# Altium PCB FPGA_Nixie_Clock.PcbDoc
Units mil, origin at the board's own origin, x right, y up, seen from the top; angles counter-clockwise.
Board outline 7250 x 1500 mil, 2 copper layers (Top Layer, Bottom Layer); 149 components, 112 nets, 537 pads, 13 vias.
Unrouted connection lines stored in the file: 283.
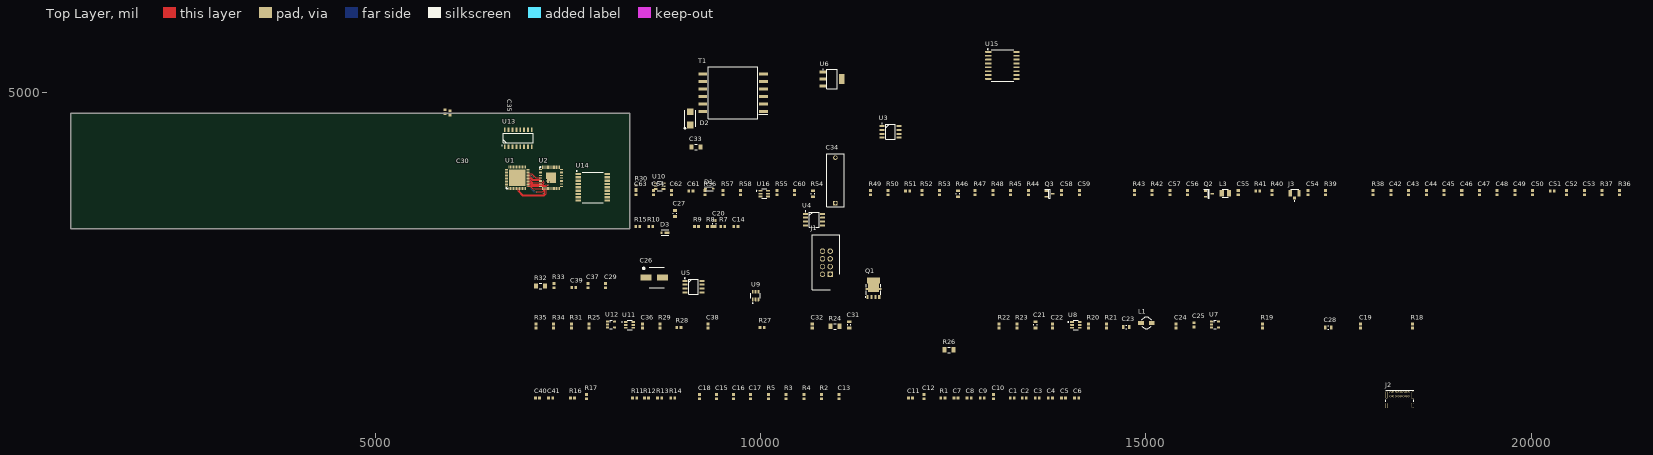
[diagram p0: Top Layer view]
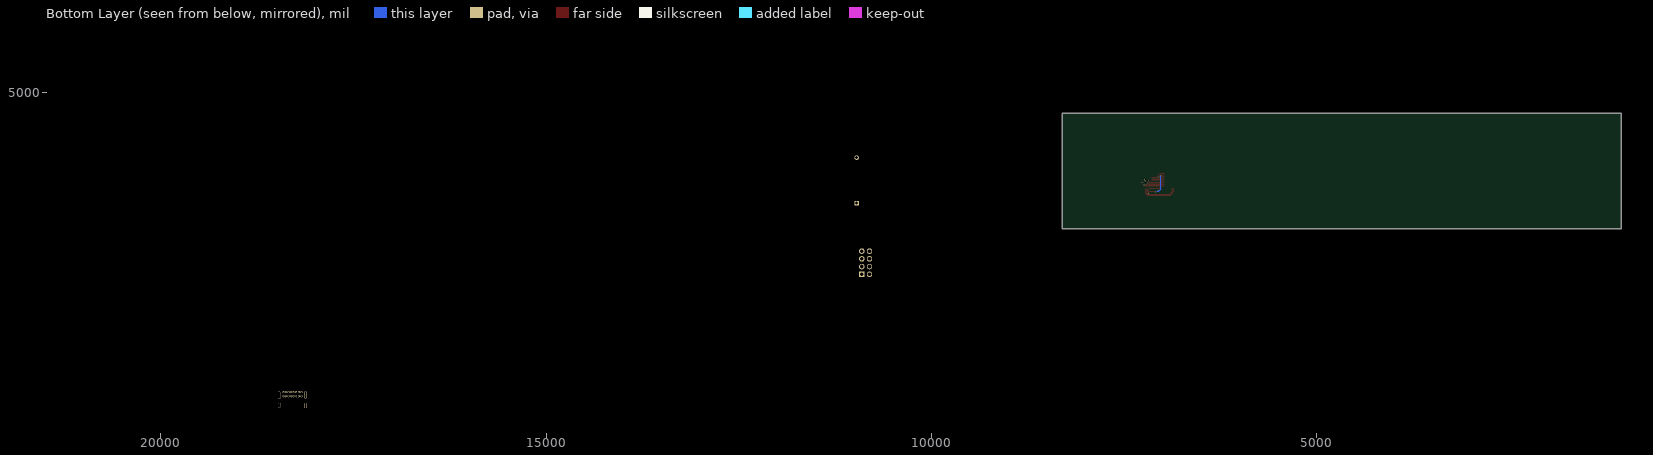
[diagram p1: Bottom Layer view, seen from below]

## Layer stack, top to bottom
Top Solder: solder mask 0.4, Solder Resist, Dk 3.5
Top Layer: signal copper 1.4
Dielectric 1: dielectric 12.6, FR-4, Dk 4.8
Bottom Layer: signal copper 1.4
Bottom Solder: solder mask 0.4, Solder Resist, Dk 3.5

## Board outline
1050,3230 1050,4730 8300,4730 8300,3230

## Design rules (kind name [scope] priority, off if disabled: settings)
BoardOutlineClearance [All] p1: gap=7.87 ignorepadtopadclearanceinfootprint=FALSE
Clearance [All] p1: gap=8 ignorepadtopadclearanceinfootprint=TRUE except(4: Arc-Arc Arc-Track Arc-SMDPad Arc-Text Track-Track Track-SMDPad Track-Text SMDPad-THPad SMDPad-Via THPad-THPad THPad-Via Via-Text Text-Text; 6: SMDPad-SMDPad SMDPad-Text THPad-Text Fill-Text Poly-Text Region-Text; 10: Arc-Hole Track-Hole SMDPad-Hole THPad-Hole Via-Hole Fill-Hole Poly-Hole Region-Hole Text-Hole; 12: Arc-THPad Track-THPad)
ComponentClearance [All] p1: gap=4 collisioncheckmode=3 verticalgap=4 showdistances=TRUE
DiffPairsRouting [All] p1: maxlimit=4 minlimit=4 mostfreqgap=4 toplayer_minwidth=4 toplayer_maxwidth=71497.94 toplayer_prefwidth=4 bottomlayer_minwidth=4 bottomlayer_maxwidth=71497.94 bottomlayer_prefwidth=4 maxuncoupledlength=500
Height [All] p1: minheight=0 maxheight=71497.94 prefheight=500
HoleSize [All] p1: absolutevalues=TRUE maxlimit=248.03 minlimit=7.87 maxpercent=80.000 minpercent=20.000
HoleToHoleClearance [All] p1: gap=9.84 allowstackedmicrovias=FALSE
MinimumAnnularRing [All] p1: minimumring=3
MinimumSolderMaskSliver [All] p1: minsoldermaskwidth=0
PlaneClearance [All] p1: clearance=4
PlaneConnect PlaneConnectPowerPads [InPadClass('PowerPads')] p1: planeconnectstyle=Direct reliefexpansion=40 reliefentries=4 reliefconductorwidth=4 reliefairgap=4
PlaneConnect [All] p2: planeconnectstyle=Direct reliefexpansion=12 reliefentries=4 reliefconductorwidth=12 reliefairgap=12
PolygonConnect ThermalPad [All vs InPadClass('ThermalPad')] p1: connectstyle=Direct reliefconductorwidth=10 reliefentries=4 polygonreliefangle="90 Angle" airgapwidth=10
PolygonConnect PolygonConnectPowerPads [All vs (InNetClass('PowerNet') OR InPadClass('PowerPads'))] p2: thpad.connectstyle=Relief thpad.reliefconductorwidth=20 thpad.reliefentries=4 thpad.polygonreliefangle="90 Angle" thpad.airgapwidth=8 smdpad.connectstyle=Relief smdpad.reliefconductorwidth=20 smdpad.reliefentries=4 smdpad.polygonreliefangle="90 Angle" smdpad.airgapwidth=8 via.connectstyle=Direct via.reliefconductorwidth=20 via.reliefentries=4 via.polygonreliefangle="90 Angle" via.airgapwidth=4
PolygonConnect [All] p3: thpad.connectstyle=Relief thpad.reliefconductorwidth=12 thpad.reliefentries=4 thpad.polygonreliefangle="90 Angle" thpad.airgapwidth=8 thpad.conductorbypadedge=TRUE thpad.mindistance=15 thpad.enablemindistance=FALSE smdpad.connectstyle=Relief smdpad.reliefconductorwidth=12 smdpad.reliefentries=4 smdpad.polygonreliefangle="90 Angle" smdpad.airgapwidth=8 smdpad.conductorbypadedge=TRUE smdpad.mindistance=15 smdpad.enablemindistance=FALSE via.connectstyle=Direct via.reliefconductorwidth=12 via.reliefentries=4 via.polygonreliefangle="90 Angle" via.airgapwidth=12
RoutingVias [All] p1: holewidth=7.87 width=17.72 viastyle="Through Hole" minholewidth=7.87 minwidth=17.72 maxholewidth=248.03 maxwidth=257.87
SilkToSilkClearance [All] p1: silktosilkclearance=0
SilkToSolderMaskClearance [IsPad] p1: minsilkscreentomaskgap=4 clearancetoexposedcopper=TRUE
SolderMaskExpansion [All] p1: expansion=2.95 istentingtop=FALSE
SupplyNets "Schematic Supply Nets" [InNet('1V1')] p1: voltage=0.000
SupplyNets "Schematic Supply Nets_10" [InNet('12V')] p2: voltage=0.000
SupplyNets "Schematic Supply Nets_9" [InNet('3V3')] p3: voltage=0.000
SupplyNets "Schematic Supply Nets_8" [InNet('VCC_1')] p4: voltage=0.000
SupplyNets "Schematic Supply Nets_7" [InNet('12V')] p5: voltage=0.000
SupplyNets "Schematic Supply Nets_2" [InNet('GND')] p6: voltage=0.000
Width [All] p1: maxlimit=71497.94 minlimit=4 preferedwidth=4
20 further rules are at their usual default settings.

## Classes and differential pairs
component class U_MCU: C42 C43 C44 C45 C46 C47 C48 C49 C50 C51 C52 C53 C54 C55 C56 C57 C58 C59 C60 C61 C62 C63 C64 J3 L3 Q2 Q3 R36 R37 R38 R39 R40 R41 R42 R43 R44 R45 R46 R47 R48 R49 R50 R51 R52 R53 R54 R55 R56 R57 R58 U2 U14 U15 U16
component class U_Nixie: C40 C41 U13
component class U_Power: C19 C20 C21 C22 C23 C24 C25 C26 C27 C28 C29 C30 C31 C32 C33 C34 C35 C36 C37 C38 C39 D1 D2 D3 J2 L1 Q1 R18 R19 R20 R21 R22 R23 R24 R25 R26 R27 R28 R29 R30 R31 R32 R33 R34 R35 T1 U6 U7 U8 U9 U10 U11 U12
component class U_FPGA: C1 C2 C3 C4 C5 C6 C7 C8 C9 C10 C11 C12 C13 C14 C15 C16 C17 C18 J1 R1 R2 R3 R4 R5 R7 R8 R9 R10 R11 R12 R13 R14 R15 R16 R17 U1 U3 U4 U5

## Components (designator, comment, footprint, x,y, rotation, side; value= is the part's Value field where it differs from the comment)
C1 "CL10B105KP8NFNC" 0603 13265,1035 r0 top
C2 "MT18B104K500CT" 0603 13420,1035 r0 top
C3 "CL10B105KP8NFNC" 0603 13590,1035 r0 top
C4 "MT18B104K500CT" 0603 13760,1035 r0 top
C5 "CL10B105KP8NFNC" 0603 13930,1035 r0 top
C6 "MT18B104K500CT" 0603 14100,1035 r0 top
C7 "CL10B105KP8NFNC" 0603 12535,1035 r0 top
C8 "MT18B104K500CT" 0603 12705,1035 r0 top
C9 "CL10B105KP8NFNC" 0603 12875,1035 r0 top
C10 "MT18B104K500CT" 0603 13020,1055 r90 top
C11 "0603X106M100CT" 0603 11945,1035 r0 top
C12 "MT18B104K500CT" 0603 12120,1055 r90 top
C13 "MT18B104K500CT" 0603 11020,1055 r90 top
C14 "MT18B104K500CT" 0603 9678.62,3260.99 r0 top
C15 "GRM1885C1H202JA01D" 0603 9430,1055 r90 top
C16 "GRM1885C1H202JA01D" 0603 9650,1055 r90 top
C17 "GRM1885C1H202JA01D" 0603 9870,1055 r90 top
C18 "MT18B104K500CT" 0603 9210,1055 r90 top
C19 "CL10A475KP8NNNC" 0603 17785,1970 r90 top
C20 "GRM21BR61E226ME44K" 0805 9400,3300 r90 top
C21 "GRM21BR61H106KE43L" 0805 13565,1985 r90 top
C22 "MT18B104K500CT" 0603 13785,1970 r90 top
C23 "GRM21BR61H106KE43L" 0805 14745,1960 r0 top
C24 "CL10B105KP8NFNC" 0603 15390,1970 r90 top
C25 "CL10A475KP8NNNC" 0603 15620,1985 r90 top
C26 "EHBSA025M1010608T" 0608 8620,2600 r0 top
C27 "GRM21BR61E226ME44K" 0805 8890,3430.37 r90 top
C28 "GRM21BR61H106KE43L" 0805 17365,1950 r0 top
C29 "CL10B105KP8NFNC" 0603 7990,2495 r90 top
C30 "MT18B104K500CT" 0603 5972.44,4736.22 r270 top
C31 "GRM2165C2A153JA01D" 0805 11150,1985 r90 top
C32 "CL10B105KP8NFNC" 0603 10670,1970 r90 top
C33 "VJ1206Y473KXEAT5Z" 1206 9160.91,4293 r0 top
C34 "ECW-FD2W474K" "15mm Film Capacitor" 10970,3565 r90 top
C35 "MT18B104K500CT" 0603 5903.54,4750.98 r270 top
C36 "MT18B104K500CT" 0603 8465,1970 r90 top
C37 "CL10B105KP8NFNC" 0603 7760,2495 r90 top
C38 "MT18B104K500CT" 0603 9315,1970 r90 top
C39 "VJ0603A331FXACW1BC" 0603 7575,2470 r0 top
C40 "MT18B104K500CT" 0603 7105,1035 r0 top
C41 "MT18B104K500CT" 0603 7275,1035 r0 top
C42 "CL10A475KP8NNNC" 0603 18177,3701 r90 top
C43 "MT18B104K500CT" 0603 18407,3701 r90 top
C44 "MT18B104K500CT" 0603 18637,3701 r90 top
C45 "MT18B104K500CT" 0603 18867,3701 r90 top
C46 "MT18B104K500CT" 0603 19097,3701 r90 top
C47 "MT18B104K500CT" 0603 19327,3701 r90 top
C48 "MT18B104K500CT" 0603 19557,3701 r90 top
C49 "MT18B104K500CT" 0603 19787,3701 r90 top
C50 "MT18B104K500CT" 0603 20017,3701 r90 top
C51 "MT18B104K500CT" 0603 20271,3725 r0 top
C52 "0603X106M100CT" 0603 20457,3701 r90 top
C53 "MT18B104K500CT" 0603 20687,3701 r90 top
C54 "CL10A475KP8NNNC" 0603 17102,3701 r90 top
C55 "MT18B104K500CT" 0603 16197,3701 r90 top
C56 "CL10B103KB8NNNL" 0603 15541,3701 r90 top
C57 "CL10A475KP8NNNC" 0603 15311,3701 r90 top
C58 "MT18B104K500CT" 0603 13905,3701 r90 top
C59 "0603X106M100CT" 0603 14135,3701 r90 top
C60 "MT18B104K500CT" 0603 10441,3701 r90 top
C61 "VJ0603A180FXXPW1BC" 0603 9095,3725 r0 top
C62 "VJ0603A180FXXPW1BC" 0603 8841,3701 r90 top
C63 "MT18B104K500CT" 0603 8381,3701 r90 top
C64 "MT18B104K500CT" 0603 8611,3701 r90 top
D1 "SD103AWS-G3-08" SOD-323 9335,3750 r0 top
D2 "RFN2LB6S" DO-214AA 9088,4665 r90 top
D3 "RB588VYM100FH" SOD-323HE 8760,3183 r0 top
J1 "IDC 2x4 2.54mm DC3-8P" "2.54mm Pitch 1.1mm Drill 2x4P" 10903,2642 r90 top
J2 "USB4085-GF-A" FP-USB4085-GF-A-MFG 18291,954 r0 top
J3 "2337019-1" 2337019-1 16929,3693 r0 top
L1 "SD3114-100-R" "SD3114 Series" 15005,2010 r0 top
L3 "MPIA2512V3-3R3-R" 1008 16029,3693 r0 top
Q1 "NVMYS021N06CL" LFPAK-4 11464,2449 r0 top
Q2 "NTR5105PT1G" SOT-23-3 15816,3686 r0 top
Q3 "2N7002ET7G" SOT-23-3 13749,3686 r0 top
R1 "CRG0603F100R" 0603 12365,1035 r0 top
R2 "CPF0603B3K9E1" 0603 10790,1055 r90 top
R3 "CRG0603F10K" 0603 10330,1055 r90 top
R4 "CRG0603F10K" 0603 10560,1055 r90 top
R5 "CPF0603B1M0E" 0603 10100,1055 r90 top
R7 "CPF0603B62KE1" 0603 9508.34,3260.99 r0 top
R8 "CRG0603F10K" 0603 9338.05,3260.99 r0 top
R9 "CRG0603F10K" 0603 9168.75,3260.99 r0 top
R10 "RC0603JR-070RL" 0603 8575.22,3260.99 r0 top
R11 "CRG0603F10K" 0603 8365,1035 r0 top
R12 "CRG0603F10K" 0603 8520,1035 r0 top
R13 "CRG0603F10K" 0603 8690,1035 r0 top
R14 "CRG0603F10K" 0603 8860,1035 r0 top
R15 "RC0603JR-070RL" 0603 8404.94,3260.99 r0 top
R16 "RC0603JR-070RL" 0603 7560,1035 r0 top
R17 "RC0603JR-070RL" 0603 7740,1055 r90 top
R18 "RC0603JR-070RL" 0603 18455,1970 r90 top
R19 "RC0603JR-070RL" 0603 16510,1970 r90 top
R20 "CRCW060386K6FKEA" 0603 14255,1970 r90 top
R21 "CRGP0603F100K" 0603 14485,1970 r90 top
R22 "CRG0603F10K" 0603 13095,1970 r90 top
R23 "CRG0603F10K" 0603 13325,1970 r90 top
R24 "ERJ-P08J303V" 1206 10965,1965 r0 top
R25 "CRGCQ0603F3K3" 0603 7775,1970 r90 top
R26 "CRG1206F1M0" 1206 12445,1660 r0 top
R27 "CRGP0603F100K" 0603 10020,1950 r0 top
R28 "RC0603JR-070RL" 0603 8940,1950 r0 top
R29 "CRGP0603F100K" 0603 8695,1970 r90 top
R30 "RC0603JR-070RL" 0603 8385,3770 r90 top
R31 "CPF0603B100RE1" 0603 7545,1970 r90 top
R32 "TLRP2B10WR040FTD" 1206 7145,2490 r0 top
R33 "CPF0603B2K4E1" 0603 7320,2495 r90 top
R34 "CPF0603B100RE1" 0603 7315,1970 r90 top
R35 "RC0603JR-070RL" 0603 7085,1970 r90 top
R36 "CRG0603F100R" 0603 21146,3701 r90 top
R37 "CRG0603F10K" 0603 20916,3701 r90 top
R38 "CRGP0603F27R" 0603 17947,3701 r90 top
R39 "CRGP0603F27R" 0603 17332,3701 r90 top
R40 "CRGP0603F27R" 0603 16637,3701 r90 top
R41 "CRGCQ0603F10R" 0603 16451,3725 r0 top
R42 "CRG0603F100R" 0603 15081,3701 r90 top
R43 "CRGP0603F100K" 0603 14851,3701 r90 top
R44 "CRGP0603F1K0" 0603 13474,3701 r90 top
R45 "CRG0603F10K" 0603 13244,3701 r90 top
R46 "CPF0805B470KE1" 0805 12563,3686 r90 top
R47 "CPF0603B62KE1" 0603 12784,3701 r90 top
R48 "CPF0603B18KE1" 0603 13014,3701 r90 top
R49 "CRG0603F10K" 0603 11423,3701 r90 top
R50 "CRG0603F10K" 0603 11653,3701 r90 top
R51 "CRG0603F10K" 0603 11907,3725 r0 top
R52 "CRGCQ0603F2K2" 0603 12093,3701 r90 top
R53 "CRGCQ0603F2K2" 0603 12323,3701 r90 top
R54 "CPF0805B470KE1" 0805 10681,3686 r90 top
R55 "CRGP0603F1K0" 0603 10211,3701 r90 top
R56 "CRG0603F10K" 0603 9281,3701 r90 top
R57 "CRG0603F10K" 0603 9511,3701 r90 top
R58 "CRG0603F10K" 0603 9741,3701 r90 top
T1 "DA2032-AL" DA2032-AL 9642,4997 r180 top
U1 "ICE40UP5K-SG48I" QFN-48 6842.52,3894.68 r90 top
U2 "RP2354A" QFN-60 7280.5,3891.78 r0 top
U3 "LM393DR2G" SOIC-8 11686,4489 r0 top
U4 "LM393DR2G" SOIC-8 10694.78,3351 r0 top
U5 "AT25SF041B-SSHD" SOIC-8 9127.95,2481.3 r0 top
U6 "MCP1826S-3302E/DB" SOT-223-3 10928,5174 r0 top
U7 "NCP115ASN120T2G" SOT-23-5 15895,1990 r0 top
U8 "MIC2619YD6-TR" SOT-23-6 14090,1985 r0 top
U9 "TPS22995H-Q1" SOT-23-6 9935,2365 r90 top
U10 "1EDN7511B" SOT-23-6 8690,3785 r0 top
U11 "ADA4807-1ARJZ-R7" SOT-23-6 8300,1985 r0 top
U12 "NCS2250SN2T1G" SOT-23-5 8060,1990 r0 top
U13 "MC14504B" SOIC-16 6856,4407 r90 top
U14 "MAX-M10M-20B" MAX-M10M-20B 7822,3770 r270 top
U15 "DS3231S#T&R" "SOIC-16 WIDE" 13138,5352 r0 top
U16 "MCP1501T" SOT-23-6 10047,3688 r0 top

## Footprints (in the part's own frame and the unit in brackets; to place one, negate y for a bottom-side part, rotate by r counter-clockwise, add the part's x,y. Pads: shape width x height; smd on the part's side, far side on the other; paste and mask are expansions set on the pad)
"2.54mm Pitch 1.1mm Drill 2x4P" [mm] "MALE SOCKET straight idc box headers PCB CONNECTOR DOUBLE ROW DC3 HEADER 8 pins 2 rows- chinese from aliexpress"
  rect 1.8x1.8 / inner round 1.8 / far side rect 1.8x1.8 hole 1.2: 1(0,0)
  round 1.8 hole 1.2: 2(2.54,0) 3(5.08,0) 4(7.62,0) 5(7.62,2.54) 6(5.08,2.54) 7(2.54,2.54) 8(0,2.54)
  silkscreen extent -5.11,-3.13 13.08,5.97, body extent -5.08,-3.13 12.7,5.77, height 9.01
"15mm Film Capacitor" [mm]
  rect 1.5x1.5 hole 1: 1(0,0)
  round 1.5 hole 1: 2(15,0)
  silkscreen extent -1.25,-2.9 16.25,2.9, body extent -1.26,-2.9 16.24,2.9, height 10.5
0603 [mm] "0603 footprint for various passives"
  rect 0.9x1 smd: 1(-0.675,0) 2(0.675,0)
  body extent -0.8,-0.41 0.8,0.41, height 0.82
0608 [mm] "6.3mm Diameter Aluminum Polymer Cap"
  rect 3.6x1.85 smd: 1(-2.65,0) 2(2.65,0)
  silkscreen extent -3.6,-3.3 3.3,3.3, body extent -3.65,-3.3 3.65,3.3, height 8
0805 [mm] "Footprint for various 0805 passives"
  rect 0.9x1.35 smd: 1(-1,0) 2(1,0)
  silkscreen extent -0.15,-0.58 0.15,0.58, body extent -1,-0.63 1,0.63, height 0.6
1008 [mm] "10 by 08 footprint"
  rect 1.4x2.2 smd: 1(-1.2,0) 2(1.2,0)
  silkscreen extent -0.98,-1.27 1.02,1.27, body extent -1.25,-1 1.25,1, height 0.8
1206 [mm] "1206 footprint for passives, imperial"
  rect 1.3x1.8 smd: 1(-1.45,0) 2(1.45,0)
  silkscreen extent -0.38,-0.89 0.38,0.89, body extent -1.6,-0.81 1.6,0.81, height 1.61
2337019-1 [mm]
  rect 1x1.05 smd: 1(0,-1.525)
  rect 1.05x2.2 smd: 2(-1.475,0) 3(1.475,0)
  silkscreen extent -1.3,-2.6 1.3,1.3, body extent -1.5,-1.55 1.5,1.55, height 1.27
DA2032-AL [mm]
  rect 2.95x1 smd: 1(-9.975,6.25) 2(-9.975,3.75) 3(-9.975,1.25) 4(-9.975,-1.25) 5(-9.975,-3.75) 6(-9.975,-6.25) 7(9.975,-6.25) 8(9.975,-3.75) 9(9.975,-1.25) 10(9.975,1.25) 11(9.975,3.75) 12(9.975,6.25)
  silkscreen extent -11.45,-8.6 8.15,8.6, body extent -11,-8.6 11,8.6, height 8.64
DO-214AA [mm] "AKA SMB"
  rect 2.25x2.15 smd: 1(-2.2,0) 2(2.2,0)
  silkscreen extent -3.49,-1.81 2.7,1.97, body extent -2.7,-1.81 2.7,1.81, height 2.47
FP-USB4085-GF-A-MFG [mm] "USB C 2.0 Connector"
  rrect100% 0.9x2.4 hole 0.6 slot 2.1 at 90 deg paste-2539.97 mask+0: 1(-4.325,3.045) 2(4.325,3.045)
  rrect100% 0.9x1.7 hole 0.6 slot 1.4 at 90 deg paste-2539.97 mask+0: 3(-4.325,-0.335) 4(4.325,-0.335)
  round 0.66 hole 0.4 paste-2539.97 mask+0: A1(-2.975,4.025) A4(-2.125,4.025) A5(-1.275,4.025) A6(-0.425,4.025) A7(0.425,4.025) A8(1.275,4.025) A9(2.125,4.025) A12(2.975,4.025) B1(2.975,2.675) B4(2.125,2.675) B5(1.275,2.675) B6(0.425,2.675) B7(-0.425,2.675) B8(-1.275,2.675) B9(-2.125,2.675) B12(-2.975,2.675)
  silkscreen extent -4.57,0.89 4.57,4.73, body extent -4.87,-4.83 4.87,4.83, height 0.25
LFPAK-4 [mil] "SOT-1023"
  rect 27.56x55 smd: 1(-75,-102.28) 2(-25,-102.28) 3(25,-102.28) 4(75,-102.28)
  rect 138x115 smd: 5(0,19.37)
  rect 172x80 smd: 6(0,114)
  rect 36x24 smd: 7(86.14,1.46) 8(-86.14,1.46)
  silkscreen extent -106,-106 96,63, body extent -104,-115 104,155, height 49
MAX-M10M-20B [mm]
  rect 0.7x1.8 smd: 1(-4.4,-4.75) 9(4.4,-4.75) 10(4.4,4.75) 18(-4.4,4.75)
  rect 0.8x1.8 smd: 2(-3.3,-4.75) 3(-2.2,-4.75) 4(-1.1,-4.75) 5(0,-4.75) 6(1.1,-4.75) 7(2.2,-4.75) 8(3.3,-4.75) 11(3.3,4.75) 12(2.2,4.75) 13(1.1,4.75) 14(0,4.75) 15(-1.1,4.75) 16(-2.2,4.75) 17(-3.3,4.75)
  silkscreen extent -5.54,-5.39 5.05,3.5, body extent -5.05,-4.85 5.05,4.85, height 2.8
QFN-48 [mm] "7x7mm 48-Pin Quad Flat No Lead Package 0.5mm pitch"
  rect 1x0.25 smd: 1(-3.525,2.75) 2(-3.525,2.25) 3(-3.525,1.75) 4(-3.525,1.25) 5(-3.525,0.75) 6(-3.525,0.25) 7(-3.525,-0.25) 8(-3.525,-0.75) 9(-3.525,-1.25) 10(-3.525,-1.75) 11(-3.525,-2.25) 12(-3.525,-2.75) 25(3.525,-2.75) 26(3.525,-2.25) 27(3.525,-1.75) 28(3.525,-1.25) 29(3.525,-0.75) 30(3.525,-0.25) 31(3.525,0.25) 32(3.525,0.75) 33(3.525,1.25) 34(3.525,1.75) 35(3.525,2.25) 36(3.525,2.75)
  rect 0.25x1 smd: 13(-2.75,-3.525) 14(-2.25,-3.525) 15(-1.75,-3.525) 16(-1.25,-3.525) 17(-0.75,-3.525) 18(-0.25,-3.525) 19(0.25,-3.525) 20(0.75,-3.525) 21(1.25,-3.525) 22(1.75,-3.525) 23(2.25,-3.525) 24(2.75,-3.525) 37(2.75,3.525) 38(2.25,3.525) 39(1.75,3.525) 40(1.25,3.525) 41(0.75,3.525) 42(0.25,3.525) 43(-0.25,3.525) 44(-0.75,3.525) 45(-1.25,3.525) 46(-1.75,3.525) 47(-2.25,3.525) 48(-2.75,3.525)
  rect 5.5x5.5 smd: 49(0,0)
  silkscreen extent -3.7,3.2 -3.2,3.7, body extent -3.57,-3.57 3.57,3.57, height 0.75
QFN-60 [mm] "7x7mm 60 pin Quad Flat No Lead Package 0.4mm Pitch"
  rect 1x0.2 smd: 1(-3.525,2.8) 2(-3.525,2.4) 3(-3.525,2) 4(-3.525,1.6) 5(-3.525,1.2) 6(-3.525,0.8) 7(-3.525,0.4) 8(-3.525,0) 9(-3.525,-0.4) 10(-3.525,-0.8) 11(-3.525,-1.2) 12(-3.525,-1.6) 13(-3.525,-2) 14(-3.525,-2.4) 15(-3.525,-2.8) 31(3.525,-2.8) 32(3.525,-2.4) 33(3.525,-2) 34(3.525,-1.6) 35(3.525,-1.2) 36(3.525,-0.8) 37(3.525,-0.4) 38(3.525,0) 39(3.525,0.4) 40(3.525,0.8) 41(3.525,1.2) 42(3.525,1.6) 43(3.525,2) 44(3.525,2.4) 45(3.525,2.8)
  rect 0.2x1 smd: 16(-2.8,-3.525) 17(-2.4,-3.525) 18(-2,-3.525) 19(-1.6,-3.525) 20(-1.2,-3.525) 21(-0.8,-3.525) 22(-0.4,-3.525) 23(0,-3.525) 24(0.4,-3.525) 25(0.8,-3.525) 26(1.2,-3.525) 27(1.6,-3.525) 28(2,-3.525) 29(2.4,-3.525) 30(2.8,-3.525) 46(2.8,3.525) 47(2.4,3.525) 48(2,3.525) 49(1.6,3.525) 50(1.2,3.525) 51(0.8,3.525) 52(0.4,3.525) 53(0,3.525) 54(-0.4,3.525) 55(-0.8,3.525) 56(-1.2,3.525) 57(-1.6,3.525) 58(-2,3.525) 59(-2.4,3.525) 60(-2.8,3.525)
  rect 3.45x3.45 smd: 61(0,0)
  silkscreen extent -3.7,3.2 -3.2,3.7, body extent -3.55,-3.55 3.55,3.55, height 0.9
"SD3114 Series" [mil] "Footprint for the SD3114 Series of Inductors by Eaton"
  rect 75x55 smd paste+0 mask+0: 1(-70,0) 2(70,0)
  silkscreen extent -62,-78 62,78, body extent -85,-73 85,73, height 67
SOD-323 [mm]
  rect 0.84x0.46 smd: 1(-1.27,0) 2(1.27,0)
  silkscreen extent -1.59,-0.64 1.27,0.7, body extent -1.34,-0.65 1.34,0.65, height 0.95
SOD-323HE [mil]
  rect 71x33 smd paste+0 mask+0: 1(25.5,0)
  rect 28x33 smd paste+0 mask+0: 2(-47,0)
  silkscreen extent -46,-34 46,34, body extent -53,-29 53,29, height 32
SOIC-8 [mm]
  rrect15% 1.65x0.65 smd: 1(-2.825,1.905) 2(-2.825,0.635) 3(-2.825,-0.635) 4(-2.825,-1.905) 5(2.825,-1.905) 6(2.825,-0.635) 7(2.825,0.635) 8(2.825,1.905)
  silkscreen extent -2.95,-2.5 1.6,2.9, body extent -3,-2.45 3,2.45, height 1.63
SOIC-16 [mm] "SOIC-16 Narrow Footprint"
  rect 1.55x0.6 smd: 1(-2.775,4.445) 2(-2.775,3.175) 3(-2.775,1.905) 4(-2.775,0.635) 5(-2.775,-0.635) 6(-2.775,-1.905) 7(-2.775,-3.175) 8(-2.775,-4.445) 9(2.775,-4.445) 10(2.775,-3.175) 11(2.775,-1.905) 12(2.775,-0.635) 13(2.775,0.635) 14(2.775,1.905) 15(2.775,3.175) 16(2.775,4.445)
  silkscreen extent -2.42,-4.95 1.56,5.4, body extent -3.01,-4.95 3.01,4.95, height 1.75
"SOIC-16 WIDE" [mm] "SOIC-16 Wide (Default) Variation"
  rrect25% 2.05x0.59 smd paste+0 mask+0.102: 1(-4.655,4.445) 2(-4.655,3.175) 3(-4.655,1.905) 4(-4.655,0.635) 5(-4.655,-0.635) 6(-4.655,-1.905) 7(-4.655,-3.175) 8(-4.655,-4.445) 9(4.655,-4.445) 10(4.655,-3.175) 11(4.655,-1.905) 12(4.655,-0.635) 13(4.655,0.635) 14(4.655,1.905) 15(4.655,3.175) 16(4.655,4.445)
  silkscreen extent -4.95,-5.15 3.75,5.46, body extent -5.16,-5.15 5.16,5.15, height 2.65
SOT-23-3 [mm]
  rect 1.1x0.6 smd: 1(-1.1,0.95) 2(-1.1,-0.95) 3(1.1,0)
  silkscreen extent -1.65,-1.45 0.2,1.5, body extent -1.21,-1.45 1.21,1.45, height 1.12
SOT-23-5 [mm] "generic sot-23-5 footprint"
  rrect35% 1x0.6 smd: 1(-1.2,0.95) 2(-1.2,0) 3(-1.2,-0.95) 4(1.2,-0.95) 5(1.2,0.95)
  silkscreen extent -0.4,-1.4 0.4,1.4, body extent -1.4,-1.45 1.4,1.45, height 1.45
SOT-23-6 [mm] "generic sot-23-6 footprint"
  rrect25% 1.21x0.58 smd: 1(-1.255,0.95) 2(-1.255,0) 3(-1.255,-0.95) 4(1.255,-0.95) 5(1.255,0) 6(1.255,0.95)
  silkscreen extent -2.6,-1.56 0.8,1.56, body extent -1.4,-1.45 1.4,1.45, height 1.45
SOT-223-3 [mm]
  rect 2.159x0.95 smd: 1(-3.048,2.3) 2(-3.048,0) 3(-3.048,-2.3)
  rect 1.9x3.25 smd: 4(3.15,0)
  silkscreen extent -3.17,-3.25 1.75,3.3, body extent -3.5,-3.25 3.5,3.25, height 1.8

## Part data
C1 C3 C5 C7 C9 C24 C29 C32 C37: "1 µF ±10% 10V Ceramic Capacitor X7R 0603 (1608 Metric)", Capacitance=1uF, Dielectric=X7R, Tolerance=10%, Voltage Rating=10V
C2 C4 C6 C8 C10 C12 C13 C14 C18 C22 C30 C35 C36 C38 C40 C41 C43 C44 C45 C46 C47 C48 C49 C50 C51 C53 C55 C58 C60 C63 C64: "0.1 µF ±10% 50V Ceramic Capacitor X7R 0603 (1608 Metric)", Capacitance=100nF, Dielectric=X7R, Tolerance=10%, Voltage Rating=50V
C11 C52 C59: "10 µF ±20% 10V Ceramic Capacitor X5R 0603 (1608 Metric)", Capacitance=10uF, Dielectric=X5R, Tolerance=20%, Voltage Rating=10V
C15 C16 C17: "2000 pF ±5% 50V Ceramic Capacitor C0G, NP0 0603 (1608 Metric)", Capacitance=2nF, Dielectric="C0G (NP0)", Tolerance=5%, Voltage Rating=50V
C19 C25 C42 C54 C57: "4.7 µF ±10% 10V Ceramic Capacitor X5R 0603 (1608 Metric)", Capacitance=4.7uF, Dielectric=X5R, Tolerance=10%, Voltage Rating=10V
C20 C27: "22 µF ±20% 25V Ceramic Capacitor X5R 0805 (2012 Metric)", Capacitance=22uF, Dielectric=X5R, Tolerance=20%, Voltage Rating=25V
C21 C23 C28: "10 µF ±10% 50V Ceramic Capacitor X5R 0805 (2012 Metric)", Capacitance=10uF, Dielectric=X5R, Tolerance=10%, Voltage Rating=50V
C26: "100 µF 25 V Aluminum - Polymer Capacitors Radial, Can - SMD 30mOhm 4000 Hrs @ 125°C", Capacitance=100uF, Dielectric=AOP, Tolerance=20%, Voltage Rating=25V
C31: "0.015 µF ±5% 100V Ceramic Capacitor C0G, NP0 0805 (2012 Metric)", Capacitance=15nF, Dielectric="C0G (NP0)", Tolerance=5%, Voltage Rating=100V
C33: "Multilayer Ceramic Capacitors MLCC - SMD/SMT 1206 .047uF 500volts X7R 10%", Capacitance=47nF, Dielectric=X7R, Tolerance=10%, Voltage Rating=500V
C34: "0.47 µF Film Capacitor 450V Polypropylene (PP), Metallized Radial", Capacitance=470nF, Dielectric=PP, Tolerance=10%, Voltage Rating=450V
C39: "330 pF ±1% 50V Ceramic Capacitor C0G, NP0 0603 (1608 Metric)", Capacitance=330pF, Dielectric="C0G (NP0)", Tolerance=1%, Voltage Rating=50V
C56: "10000 pF ±10% 50V Ceramic Capacitor X7R 0603 (1608 Metric)", Capacitance=10nF, Dielectric=X7R, Tolerance=10%, Voltage Rating=50V
C61 C62: "18 pF ±1% 25V Ceramic Capacitor C0G, NP0 0603 (1608 Metric)", Capacitance=18pF, Dielectric="C0G (NP0)", Tolerance=1%, Voltage Rating=50V
D1: "Diode 40 V 350mA Surface Mount SOD-323", Average Current=350mA, Package=SOD-323, Reverse Voltage=40V, Type=Schottky
D2: "Diode 600 V 2A Surface Mount SMBP", Average Current=2A, Package=DO-214AA, Reverse Voltage=600V, Type="Fast Recovery"
D3: "Diode 100 V 700mA Surface Mount TUMD2M (SOD-323HE)", Average Current=700mA, Package=SOD-323HE, Reverse Voltage=100V, Type=Schottky
J1: "Straight idc box headers PCB CONNECTOR DOUBLE ROW DC3 HEADER", M/F=Male, Pins=8, Pitch=2.54mm, Rows=2
J2: "USB-C USB 2.0 Receptacle"
J3: "U.FL (UMCC) Connector Receptacle, Male Pin 50 Ohms Surface Mount Solder"
L1: "10 µH Shielded Drum Core, Wirewound Inductor 570 mA 458mOhm Nonstandard", Avg Current=570mA, Inductance=10uH, Resistance=458m, Sat Current=780mA
L3: "3.3 µH Shielded Molded Inductor 1.8 A 135mOhm Max 1008 (2520 Metric)", Avg Current=1.8A, Inductance=3.3uH, Resistance=135m, Sat Current=2.8A
Q1: "N-Channel 60 V 9.8A (Ta), 27A (Tc) 3.8W (Ta), 28W (Tc) Surface Mount LFPAK4 (5x6)"
Q2: "P-Channel 60 V 196mA (Ta) 347mW (Ta) Surface Mount SOT-23-3 (TO-236)"
Q3: "N-Channel 60 V 260mA (Ta) 300mW (Tj) Surface Mount SOT-23-3 (TO-236)"
R1 R36 R42: "100 Ohms ±1% 0.1W, 1/10W Chip Resistor 0603 (1608 Metric) Thick Film", Case Code=0603, Power Rating=100mW, Resistance=100, Temperature Coefficient=100ppm/c, Tolerance=1%
R2: "3.9 kOhms ±0.1% 0.063W, 1/16W Chip Resistor 0603 (1608 Metric) Thin Film", Case Code=0603, Power Rating=62.5mW, Resistance=3.9k, Temperature Coefficient=25ppm/c, Tolerance=0.1%
R3 R4 R8 R9 R11 R12 R13 R14 R22 R23 R37 R45 R49 R50 R51 R56 R57 R58: "10 kOhms ±1% 0.1W, 1/10W Chip Resistor 0603 (1608 Metric) Thick Film", Case Code=0603, Power Rating=100mW, Resistance=10k, Temperature Coefficient=100ppm/c, Tolerance=1%
R5: "1 MOhms ±0.1% 0.063W, 1/16W Chip Resistor 0603 (1608 Metric) Thin Film", Case Code=0603, Power Rating=62.5mW, Resistance=1M, Temperature Coefficient=25ppm/c, Tolerance=0.1%
R7 R47: "62 kOhms ±0.1% 0.063W, 1/16W Chip Resistor 0603 (1608 Metric) Thin Film", Case Code=0603, Power Rating=62.5mW, Resistance=62k, Temperature Coefficient=25ppm/c, Tolerance=0.1%
R10 R15 R16 R17 R18 R19 R28 R30 R35: "0 Ohms Jumper 0.1W, 1/10W Chip Resistor 0603 (1608 Metric) Moisture Resistant Thick Film", Case Code=0603, Power Rating=100mW, Resistance=0, Temperature Coefficient=0ppm/c, Tolerance=0%
R20: "86.6 kOhms ±1% 0.125W, 1/8W Chip Resistor 0603 (1608 Metric) Automotive AEC-Q200 Thick Film", Case Code=0603, Power Rating=125mW, Resistance=86.6k, Temperature Coefficient=200ppm/c, Tolerance=1%
R21 R27 R29 R43: "100 kOhms ±1% 0.25W, 1/4W Chip Resistor 0603 (1608 Metric) Automotive AEC-Q200, Pulse Withstanding Thick Film", Case Code=0603, Power Rating=250mW, Resistance=100k, Temperature Coefficient=100ppm/c, Tolerance=1%
R24: "30 kOhms ±5% 0.667W, 2/3W Chip Resistor 1206 (3216 Metric) Automotive AEC-Q200, Pulse Withstanding Thick Film", Case Code=1206, Power Rating=667mW, Resistance=30k, Temperature Coefficient=200ppm/c, Tolerance=5%
R25: "3.3 kOhms ±1% 0.1W, 1/10W Chip Resistor 0603 (1608 Metric) Automotive AEC-Q200, Moisture Resistant Thick Film", Case Code=0603, Power Rating=100mW, Resistance=3.3k, Temperature Coefficient=100ppm/c, Tolerance=1%
R26: "1 MOhms ±1% 0.25W, 1/4W Chip Resistor 1206 (3216 Metric) Thick Film", Case Code=1206, Power Rating=250mW, Resistance=1M, Temperature Coefficient=200ppm/c, Tolerance=5%
R31 R34: "100 Ohms ±0.1% 0.063W, 1/16W Chip Resistor 0603 (1608 Metric) Thin Film", Case Code=0603, Power Rating=62.5mW, Resistance=100, Temperature Coefficient=25ppm/c, Tolerance=0.1%
R32: "40 mOhms ±1% 1W Chip Resistor 1206 (3216 Metric) Anti-Sulfur, Automotive AEC-Q200, Current Sense Metal Element", Case Code=1206, Power Rating=1W, Resistance=40m, Temperature Coefficient=75ppm/c, Tolerance=1%
R33: "2.4 kOhms ±0.1% 0.063W, 1/16W Chip Resistor 0603 (1608 Metric) Thin Film", Case Code=0603, Power Rating=62.5mW, Resistance=2.4k, Temperature Coefficient=25ppm/c, Tolerance=0.1%
R38 R39 R40: "27 Ohms ±1% 0.25W, 1/4W Chip Resistor 0603 (1608 Metric) Automotive AEC-Q200, Pulse Withstanding Thick Film", Case Code=0603, Power Rating=100mW, Resistance=27, Temperature Coefficient=100ppm/c, Tolerance=1%
R41: "10 Ohms ±1% 0.1W, 1/10W Chip Resistor 0603 (1608 Metric) Automotive AEC-Q200, Moisture Resistant Thick Film", Case Code=0603, Power Rating=100mW, Resistance=10, Temperature Coefficient=400ppm/c, Tolerance=1%
R44 R55: "1 kOhms ±1% 0.25W, 1/4W Chip Resistor 0603 (1608 Metric) Automotive AEC-Q200, Pulse Withstanding Thick Film", Case Code=0603, Power Rating=250mW, Resistance=1k, Temperature Coefficient=100ppm/c, Tolerance=1%
R46 R54: "470 kOhms ±0.1% 0.1W, 1/10W Chip Resistor 0805 (2012 Metric) Thin Film", Case Code=0805, Power Rating=62.5mW, Resistance=470k, Temperature Coefficient=25ppm/c, Tolerance=0.1%
R48: "18 kOhms ±0.1% 0.063W, 1/16W Chip Resistor 0603 (1608 Metric) Thin Film", Case Code=0603, Power Rating=62.5mW, Resistance=18k, Temperature Coefficient=25ppm/c, Tolerance=0.1%
R52 R53: "2.2 kOhms ±1% 0.1W, 1/10W Chip Resistor 0603 (1608 Metric) Automotive AEC-Q200, Moisture Resistant Thick Film", Case Code=0603, Power Rating=100mW, Resistance=2.2k, Temperature Coefficient=100ppm/c, Tolerance=1%
T1: "10 µH ±10% 1:10 Flyback Transformer Surface Mount Ferrite Core 3A Peak, 3–24V Input"
U1: "FPGA - Field Programmable Gate Array iCE40-UltraPlus, 5280 LUTs, 1.2V"
U2: "ARM Microcontrollers - 150MHz clock Dual Arm Cortex-M33 cores 520KB RAM 8KB on-chip OTP storage 7\" Reel QFN-60"
U3 U4: "Comparator Standard (General Purpose) Open-Collector, Rail-to-Rail 8-SOIC"
U5: "FLASH - NOR Memory IC 4Mbit SPI - Quad I/O 108 MHz 8-SOIC"
U6: "Linear Voltage Regulator IC Positive Fixed 1 Output 1A SOT-223-3"
U7: "Linear Voltage Regulator IC Positive Fixed 1 Output 300mA 5-TSOP"
U8: "Boost Switching Regulator IC Positive Adjustable 2.8V 1 Output 350mA (Switch) SOT-23-6 Thin, TSOT-23-6"
U9: "Power Switch/Driver 1:1 N-Channel 3A SOT-23-THIN"
U10: "Low-Side Gate Driver IC Inverting, Non-Inverting PG-SOT23-6-2"
U11: "Voltage Feedback Amplifier 1 Circuit Rail-to-Rail SOT-23-6"
U12: "Comparator Standard (General Purpose) Push-Pull, Rail-to-Rail 5-TSOP"
U13: "Voltage Level Translator Unidirectional 1 Circuit 6 Channel 16-SOIC"
U14: "RF Receiver BeiDou, Galileo, GLONASS, GNSS, GPS, QZSS, SBAS -165dBm 921.6kbps Not Included"
U15: "Real Time Clock (RTC) IC Clock/Calendar I2C, 2-Wire Serial 16-SOIC (0.295\", 7.50mm Width)"
U16: "Series Voltage Reference IC Fixed 2.048V V ±0.1% 20 mA SOT-23-6"

## Via types
v1: diameter 17.72, hole 7.87, Top Layer to Bottom Layer, 13 vias

## Nets (pads, with @x,y where several pads share a name; then routed paths per layer and width w, separated by ;. In a path a pad name is that pad's centre, name@x,y a point inside that pad or via, vN(x,y) a via of type N, cw(c..) or ccw(c..) an arc to the next point about the centre after c; other vN are vias at no path point)
1V1: C42.2 C43.2 C44.2 C57.2 L3.1 U2.6 U2.23 U2.39 U2.48
3V3: C1.2 C2.2 C3.2 C4.2 C5.2 C6.2 C13.2 C20.2 C35.1 C36.1 C41.1 R8.2 R10.2 R29.2 U1.1 U1.22 U1.24 U1.33 U6.3 U11.6 U12.5 U13.1
12V: C23.2 C37.2 C38.1 D1.1 R20.2 R21.2 R47.2 U10.1
32KHz: R50.2 U2.32 U15.1
CC1: U3.2
CC2: U4.6
CDONE: U1.7 U2.19 | length 506.8
  Top Layer w6: U1.7 6852.36,3716.64 6910,3659 7191,3659 7217.5,3685.5 U2.19
CLK_GPOUT0: U1.20 U2.17 | length 427.4
  Top Layer w6: U1.20 6981.37,3924.14 7022.78,3924.14 v1(7022.85,3924.06) ; v1(7088,3714) 7171,3714 7185.83,3728.83 7185.83,3752.82 U2.17
  Bottom Layer w6: v1(7022.85,3924.06) 7022.14,3923.35 7022.14,3895.77 7022.85,3895.06 7022.85,3745.15 7054,3714 v1(7088,3714)
CRESET: R37.1 U1.8 U2.18 | length 458.6
  Top Layer w6: U1.8 6872.05,3712.95 6911,3674 7186,3674 7201.76,3689.76 U2.18
CS_FLASH: J1.1 R12.1 U1.16 U2.13 U5.1 | length 233.9
  Top Layer w6: U1.16 6982.35,3844.42 7010.58,3844.42 7041.96,3813.04 U2.13 7180.46,3813.04 7194.42,3827 v1(7196,3827)
CS_FPGA: U1.12 U2.7 | length 0.1
  Top Layer w6: U1.12 U1.12
CURR_AMPLFD: R33.1 R34.2 U11.1 U12.3
CURR_BAD: R8.1 U3.1 U4.7
CURR_LSB: R5.1 U1.42
CURR_MSB: R2.1 U1.43
CURR_RAW: Q1.1 R31.1 R32.2
FLASH_VCC: C18.1 R10.1 R11.2 R12.2 R13.2 R14.2 R15.2 U5.8
FP_GPIO0: U1.6 U2.2
FP_GPIO1: U1.9 U2.3
GND: C1.1 C2.1 C3.1 C4.1 C5.1 C6.1 C7.1 C8.1 C9.1 C10.1 C11.1 C12.1 C13.1 C14.2 C15.1 C16.1 C17.1 C18.2 C19.1 C20.1 C21.1 C22.2 C23.1 C24.1 C25.1 C26.1 C27.1 C28.1 C29.1 C30.2 C32.1 C33.1 C34.1 C35.2 C36.2 C37.1 C38.2 C39.1 C40.2 C41.2 J1.4 J2.1 J2.2 J2.3 J2.4 J2.A1 J2.A12 J2.B1 J2.B12 R9.1 R22.1 R23.1 R25.1 R26.1 R27.1 R32.1 R34.1 T1.1 U1.49 U3.4 U5.4 U6.2 U6.4 U7.2 U7.4 U8.2 U9.4 U10.4 U11.2 U12.2 U13.8 U13.13
GNSS_INT: U2.33 U14.5
GNSS_RXD: U2.36 U14.3
GNSS_TXD: U2.37 U14.2
H*LE: U13.6
H*POL: U13.10
HCLK: U13.12
HOLD(IO3): R13.1 R17.2 U5.7
I2C0_SCL: R53.1 U2.28 U15.16
I2C0_SDA: R52.1 U2.27 U15.15
I2C1_SCL: U1.11 U2.5
I2C1_SDA: U1.10 U2.4
ICE_MISO: J1.5 U1.17 U2.12 U5.2 | length 239.6
  Top Layer w6: U1.17 7007.84,3865.16 7044.21,3828.79 7168.79,3828.79 v1(7195,3855)
ICE_MOSI: J1.2 U1.14 U2.15 U5.5 | length 282.4
  Top Layer w6: U1.14 7008.9,3806.1 7033.46,3781.54 U2.15 7221.71,3781.54 7242,3801.83 v1(7242,3805)
ICE_SCLK: R11.1 U1.15 U2.14 U5.6 | length 248.9
  Top Layer w6: U1.15 7009.98,3825.79 7038.48,3797.29 U2.14 7206.12,3797.29 v1(7214.83,3806)
L*BL: U1.23 U13.5
L*LE: U1.27 U13.7
L*POL: U1.26 U13.9
LCLK: U1.28 U13.11
LDIN1: U1.25 U13.3
LDIN2: U1.31 U13.14
NetC15_2: C15.2 R2.2 R3.2 R5.2
NetC16_2: C16.2 R3.1 R4.2
NetC17_2: C17.2 R4.1
NetC19_2: C19.2 R18.1 U6.1
NetC24_2: C24.2 R19.1 U7.1 U7.3
NetC31_1: C31.1 D3.1 R24.1
NetC33_2: C33.2 C34.2 D2.1 R26.2 R46.2
NetC39_2: C39.2 R31.2 U11.3
NetC54_2: C54.2 R38.1 U2.46
NetC56_2: C56.2 R41.1
NetC61_2: C61.2 R55.1
NetC64_2: C64.2 U16.4 U16.6
NetD1_2: D1.2 L1.2 U8.1
NetD2_2: D2.2 T1.12
NetD3_2: D3.2 Q1.5 T1.3 T1.4 T1.5 T1.6
NetJ1_3: J1.3 R16.2
NetJ1_7: J1.7 R17.1
NetJ1_8: J1.8 R15.1
NetJ3_1: J3.1 U14.11
NetL3_2: L3.2 U2.50
NetQ1_4: Q1.4 R28.2 R30.2
NetQ2_1: Q2.1 Q3.3 R43.2
NetQ2_2: Q2.2 R43.1 U14.14
NetQ2_3: Q2.3 R41.2
NetQ3_1: Q3.1 U14.13
NetR7_1: R7.1 R9.2 U3.3 U4.5
NetR20_1: R20.1 R22.2 U8.3
NetR21_1: R21.1 R23.2 U8.5
NetR25_2: R25.2 U9.6
NetR27_2: R27.2 U1.46 U9.3
NetR28_1: R28.1 U10.2
NetR29_1: R29.1 U11.5
NetR30_1: R30.1 U10.3
NetR33_2: R33.2 U11.4
NetR35_1: R35.1
NetR35_2: R35.2 U12.4
NetR39_1: R39.1 U2.52
NetR40_1: R40.1 U2.51
NetR44_2: R44.2
NetR45_1: R45.1 U2.26
NetR46_1: R46.1 R54.2
NetSW1_3: U2.60
NetU10_6: U10.6
NetU12_1: U12.1
NetU15_14: U15.14
PPS: U2.34 U14.4
RGB0: U1.39
RGB1: U1.40
RGB2: U1.41
RP_CPSL: U1.21 U2.8 | length 182.3
  Top Layer w6: U1.21 6981.65,3944.24 7030.76,3944.24 7083.22,3891.78 U2.8
RP_MISO: U1.13 U2.16 | length 202.8
  Top Layer w6: U1.13 7011.58,3786.42 7044.14,3753.86 7169.4,3753.86 U2.16
RP_MOSI: U1.18 U2.10 | length 170.6
  Top Layer w6: U1.18 7013.16,3884.84 7037.72,3860.28 U2.10
RP_SCLK: U1.19 U2.9 | length 172.2
  Top Layer w6: U1.19 7012.47,3904.53 7041,3876 U2.9
RTC_INT: R49.2 U2.31 U15.3
RTC_RST: R51.2 U2.29 U15.4
SAFEBOOT: U2.35 U14.18
SP_5V: R48.1 R58.2 U2.41
SP_12V: R47.1 R57.2 U2.42
SP_170V: R54.1 R56.2 U2.43
SPI_CLK: J1.6
USB_DN: J2.A7 J2.B7 R40.2
USB_DP: J2.A6 J2.B6 R39.2
VBUS: C32.2 J2.A4 J2.A9 J2.B4 J2.B9 R18.2 R19.2 R48.2 U9.1 U9.2
VBUS_SW: C21.2 C22.1 C26.2 C27.2 C28.2 C29.2 C30.1 C31.2 L1.1 R24.2 T1.7 T1.8 T1.9 T1.10 U8.4 U8.6 U9.5
VCC_1: C7.2 C8.2 C9.2 C10.2 C25.2 R1.2 U1.5 U1.30 U7.5
VCC_ADC: C52.2 C53.2 R36.1 U2.44
VCC_GNSS: C58.2 C59.2 R42.1
VCCPLL: C11.2 C12.2 R1.1 U1.29
VREF: C63.2 U2.40 U16.1
WP(IO2): R14.1 R16.1 U5.3
XIN: C62.1 U2.21
XOUT: R55.2 U2.22
pads on no net: C14.1 C40.1 C42.1 C43.1 C44.1 C45.1 C45.2 C46.1 C46.2 C47.1 C47.2 C48.1 C48.2 C49.1 C49.2 C50.1 C50.2 C51.1 C51.2 C52.1 C53.1 C54.1 C55.1 C55.2 C56.1 C57.1 C58.1 C59.1 C60.1 C60.2 C61.1 C62.2 C63.1 C64.1 J2.A5 J2.A8 J2.B5 J2.B8 J3.2 J3.3 Q1.2 Q1.3 Q1.6 Q1.7 Q1.8 Q3.2 R7.2 R36.2 R37.2 R38.2 R42.2 R44.1 R45.2 R49.1 R50.1 R51.1 R52.2 R53.2 R56.1 R57.1 R58.1 T1.2 T1.11 U1.2 U1.3 U1.4 U1.32 U1.34 U1.35 U1.36 U1.37 U1.38 U1.44 U1.45 U1.47 U1.48 U2.1 U2.11 U2.20 U2.24 U2.25 U2.30 U2.38 U2.45 U2.47 U2.49 U2.53 U2.54 U2.55 U2.56 U2.57 U2.58 U2.59 U2.61 U3.5 U3.6 U3.7 U3.8 U4.1 U4.2 U4.3 U4.4 U4.8 U10.5 U13.2 U13.4 U13.15 U13.16 U14.1 U14.6 U14.7 U14.8 U14.9 U14.10 U14.12 U14.15 U14.16 U14.17 U15.2 U15.5 U15.6 U15.7 U15.8 U15.9 U15.10 U15.11 U15.12 U15.13 U16.2 U16.3 U16.5
copper on no net:
  other v1: 7178,3695 7064,3734 7222,3835 7262,3837 7223,3853 7223,3872 7042,3904

## Silkscreen, mask and mechanical layers (free items; w line width, h text height)
Mechanical 1:
  the board outline again, w10